# Altium PCB main.PcbDoc
Units mil, origin at the board's own origin, x right, y up, seen from the top; angles counter-clockwise.
Board outline 6000 x 4000 mil, 2 copper layers (Top Layer, Bottom Layer); 86 components, 158 nets, 530 pads, 0 vias.
Unrouted connection lines stored in the file: 279.
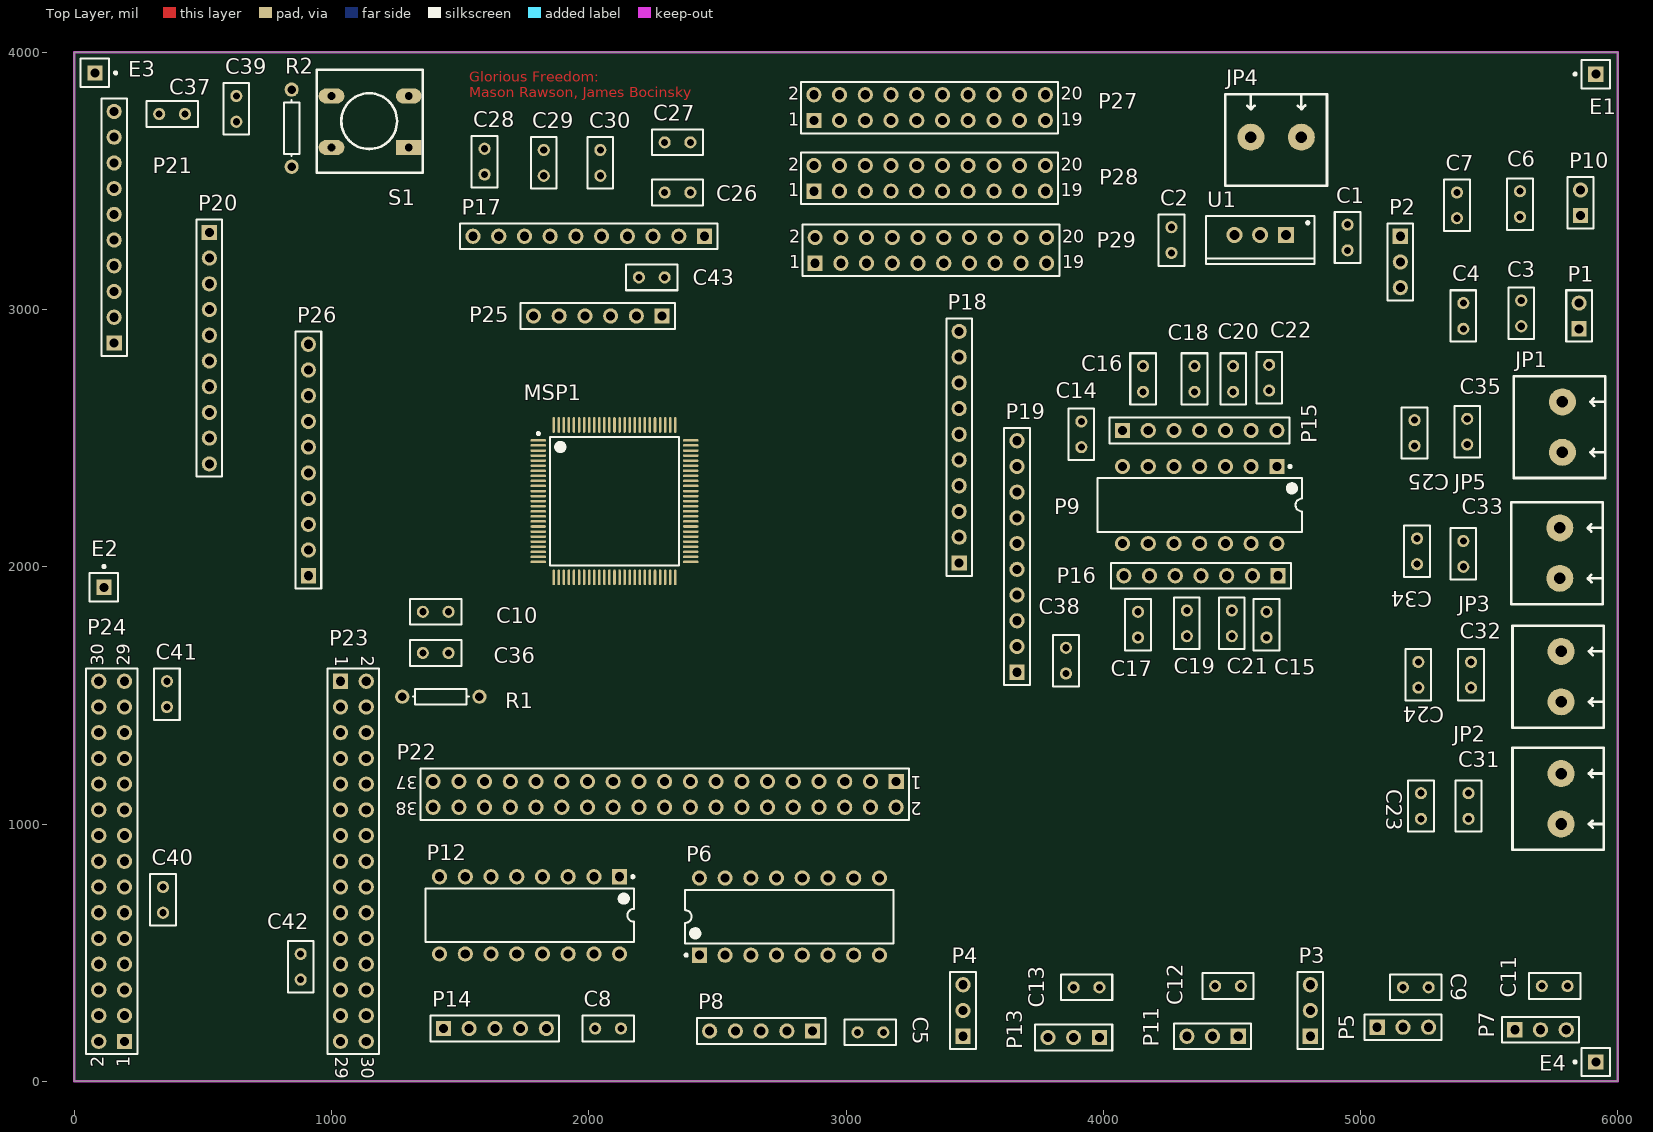
[diagram p0: Top Layer view]
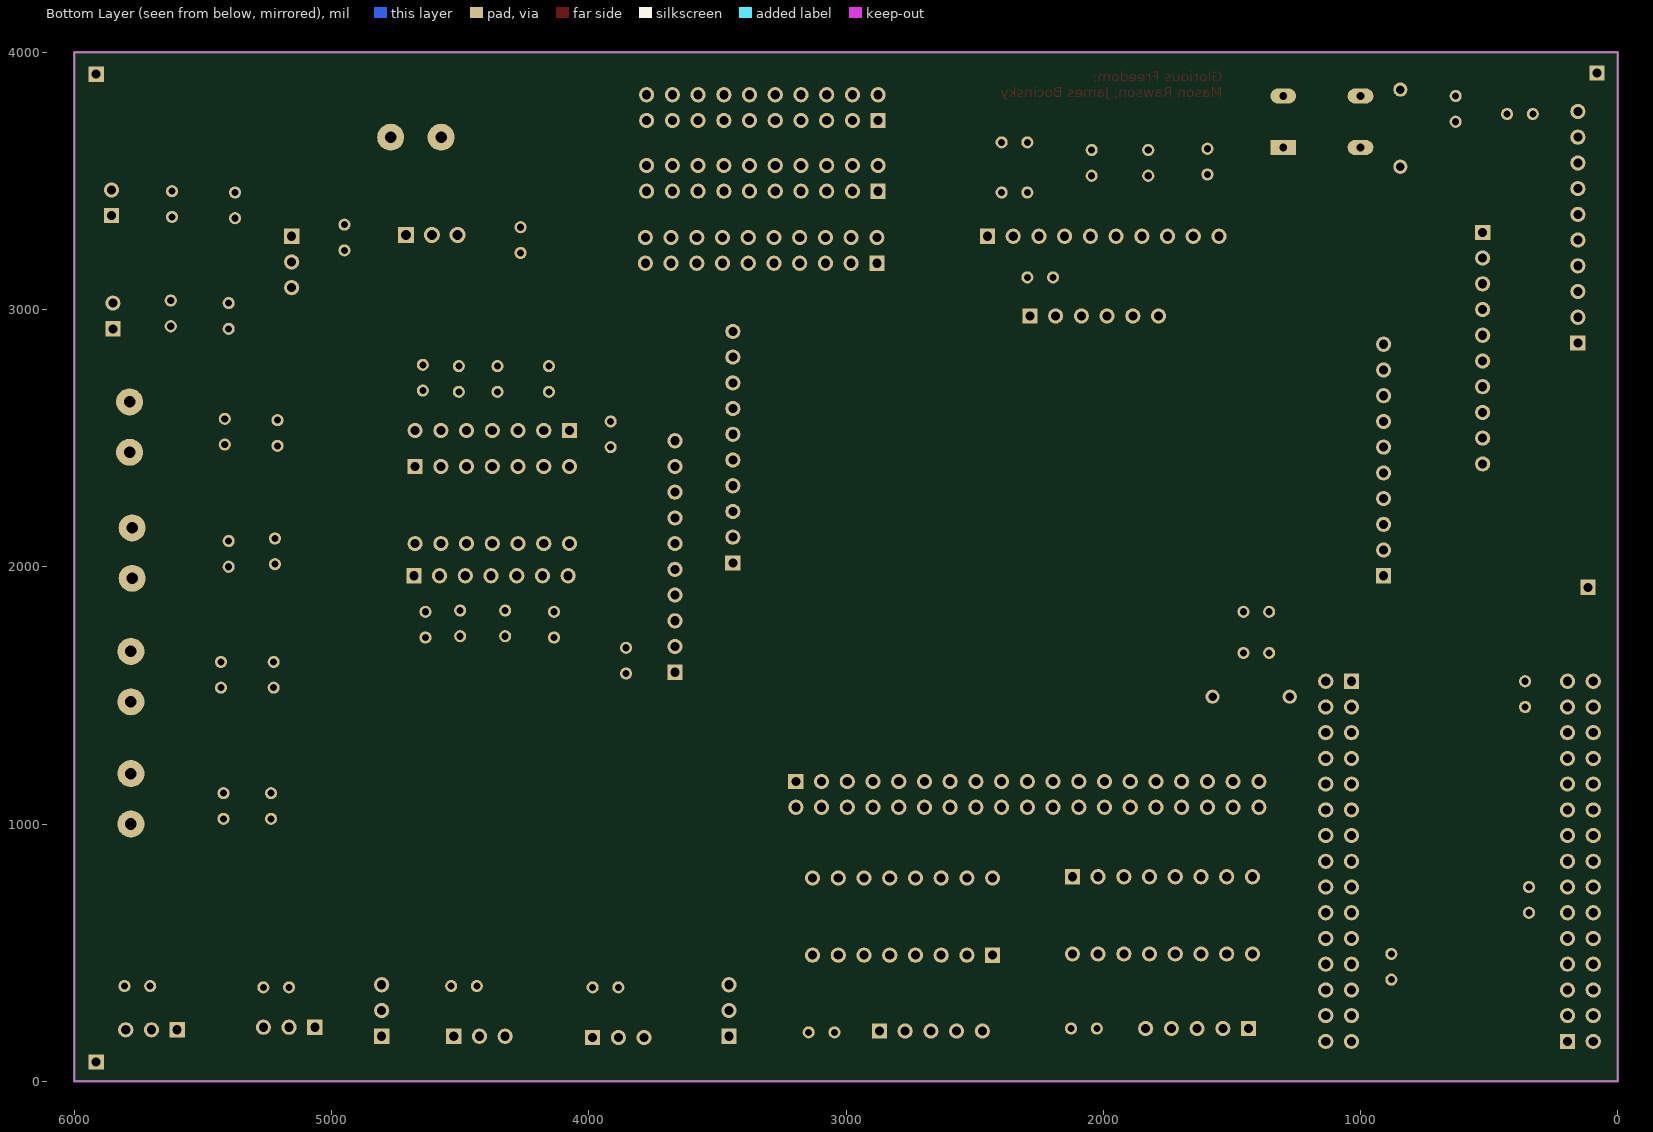
[diagram p1: Bottom Layer view, seen from below]

## Layer stack, top to bottom
Top Solder: solder mask 0.4, Solder Resist, Dk 3.5
Top Layer: signal copper 1.4
Dielectric 1: dielectric 12.6, FR-4, Dk 4.8
Bottom Layer: signal copper 1.4
Bottom Solder: solder mask 0.4, Solder Resist, Dk 3.5

## Board outline
0,0 6000,0 6000,4000 0,4000

## Design rules (kind name [scope] priority, off if disabled: settings)
Clearance CopperPour [inPolyGon] p1: gap=9
Clearance [All] p2: gap=9
PolygonConnect [All] p1: connectstyle=Relief reliefconductorwidth=10 reliefentries=4 polygonreliefangle="90 Angle" airgapwidth=10
RoutingVias [All] p1: holewidth=28 width=50 viastyle="Through Hole" minholewidth=28 minwidth=50 maxholewidth=28 maxwidth=50
SolderMaskExpansion [All] p1: expansion=4
Width "Schematic Width Constraint_6" [InNet('6V_S')] p1: maxlimit=50 minlimit=50 preferedwidth=50
Width "Schematic Width Constraint_5" [InNet('6V_1_F')] p2: maxlimit=50 minlimit=50 preferedwidth=50
Width "Schematic Width Constraint_3" [InNet('6V_1')] p3: maxlimit=50 minlimit=50 preferedwidth=50
Width "Schematic Width Constraint_2" [InNet('6V_0_F')] p4: maxlimit=50 minlimit=50 preferedwidth=50
Width "Schematic Width Constraint_1" [InNet('4V5_F')] p5: maxlimit=50 minlimit=50 preferedwidth=50
Width "Schematic Width Constraint" [InNet('4V5')] p6: maxlimit=50 minlimit=50 preferedwidth=50
Width "Schematic Width Constraint_7" [InNet('6V_L')] p7: maxlimit=50 minlimit=50 preferedwidth=50
Width "Schematic Width Constraint_4" [InNet('6V_0')] p8: maxlimit=50 minlimit=50 preferedwidth=50
Width [All] p9: maxlimit=10 minlimit=9 preferedwidth=10
30 further rules are at their usual default settings.

## Classes and differential pairs
component class power: C1 C2 C3 C4 C5 C6 C7 C8 C9 C11 C12 C13 C14 C15 C16 C17 C18 C19 C20 C21 C22 C23 C24 C25 C31 C32 C33 C34 C35 JP1 JP2 JP3 JP4 JP5 P1 P2 P3 P4 P5 P6 P7 P8 P9 P10 P11 P12 P13 P14 U1
component class logic: C10 C26 C27 C28 C29 C30 C36 C39 MSP1 R1 R2 S1
component class comm: C40 C41 C42 C43 P23 P24 P25
component class breakout: C37 C38 E1 E2 E3 E4 P15 P16 P17 P18 P19 P20 P21 P22 P26 P27 P28 P29

## Components (designator, comment, footprint, x,y, rotation, side; value= is the part's Value field where it differs from the comment)
C1 "Cap2" RAD-0.1 4950,3280 r90 top
C2 "Cap2" RAD-0.1 4265,3270 r270 top
C3 "Cap" RAD-0.1 5625,2985 r90 top
C4 "Cap" RAD-0.1 5400,2975 r270 top
C5 "Cap" RAD-0.1 3095,190 r180 top
C6 "Cap" RAD-0.1 5620,3410 r90 top
C7 "Cap" RAD-0.1 5375,3405 r270 top
C8 "Cap" RAD-0.1 2075,205 r0 top
C9 "Cap" RAD-0.1 5215,365 r180 top
C10 "Cap" RAD-0.1 1405,1825 r0 top
C11 "Cap" RAD-0.1 5755,370 r0 top
C12 "Cap" RAD-0.1 4485,370 r180 top
C13 "Cap" RAD-0.1 3935,365 r180 top
C14 "Cap" RAD-0.1 3915,2515 r270 top
C15 "Cap" RAD-0.1 4635,1775 r90 top
C16 "Cap" RAD-0.1 4155,2730 r270 top
C17 "Cap" RAD-0.1 4135,1775 r270 top
C18 "Cap" RAD-0.1 4355,2730 r270 top
C19 "Cap" RAD-0.1 4325,1780 r270 top
C20 "Cap" RAD-0.1 4505,2730 r270 top
C21 "Cap" RAD-0.1 4500,1780 r270 top
C22 "Cap" RAD-0.1 4645,2735 r270 top
C23 "Cap" RAD-0.1 5235,1070 r270 top
C24 "Cap" RAD-0.1 5225,1580 r270 top
C25 "Cap" RAD-0.1 5210,2520 r270 top
C26 "Cap" RAD-0.1 2345,3455 r0 top
C27 "Cap" RAD-0.1 2345,3650 r0 top
C28 "Cap" RAD-0.1 1595,3575 r90 top
C29 "Cap" RAD-0.1 1825,3570 r90 top
C30 "Cap" RAD-0.1 2045,3570 r90 top
C31 "Cap" RAD-0.1 5420,1070 r270 top
C32 "Cap" RAD-0.1 5430,1580 r270 top
C33 "Cap" RAD-0.1 5400,2050 r270 top
C34 "Cap" RAD-0.1 5220,2060 r270 top
C35 "Cap" RAD-0.1 5415,2525 r270 top
C36 "Cap" RAD-0.1 1405,1665 r0 top
C37 "Cap" RAD-0.1 380,3760 r180 top
C38 "Cap" RAD-0.1 3855,1635 r90 top
C39 "Cap" RAD-0.1 630,3780 r270 top
C40 "Cap" RAD-0.1 345,705 r270 top
C41 "Cap" RAD-0.1 360,1505 r90 top
C42 "Cap" RAD-0.1 880,445 r90 top
C43 "Cap" RAD-0.1 2245,3125 r180 top
E1 "mount" PIN1 5915,3915 r90 top
E2 "mount" PIN1 115,1920 r0 top
E3 "mount" PIN1 80,3920 r270 top
E4 "mount" PIN1 5915,75 r90 top
JP1 "gunPower" CON2screw 5785,2445 r90 top
JP2 "turretPower_0" CON2screw 5780,1000 r90 top
JP3 "turretPower_1" CON2screw 5780,1475 r90 top
JP4 "logicPower" CON2screw 4770,3670 r180 top
JP5 "stepperPower" CON2screw 5775,1955 r90 top
MSP1 "MSP432" PZ100_L 2100,2255 r0 top
P1 "gun_0" HDR1X2 5850,2925 r90 top
P2 "gunFet" HDR1X3 5155,3285 r270 top
P3 "turrFet_0" HDR1X3 4805,175 r90 top
P4 "turrFet_1" HDR1X3 3455,175 r90 top
P5 "pt_0" HDR1X3 5065,210 r0 top
P6 "ULN2003_0" DIP-16 2780,640 r90 top
P7 "pt_1" HDR1X3 5600,200 r0 top
P8 "stepper_0" HDR1X5 2870,195 r180 top
P9 "PWM_driver" DIP-14 4375,2240 r270 top
P10 "gun_1" HDR1X2 5855,3365 r90 top
P11 "pt_2" HDR1X3 4525,175 r180 top
P12 "ULN2003_1" DIP-16 1770,645 r270 top
P13 "pt_3" HDR1X3 3985,170 r180 top
P14 "stepper_1" HDR1X5 1435,205 r0 top
P15 "pwm_header_0" HDR1X7 4075,2530 r0 top
P16 "pwm_header_1" HDR1X7 4680,1965 r180 top
P17 "Programmer" HDR1X10 2450,3285 r180 top
P18 "J1" HDR1X10 3440,2015 r90 top
P19 "J3" HDR1X10 3665,1590 r90 top
P20 "J4" HDR1X10 525,3300 r270 top
P21 "J2" HDR1X10 155,2870 r90 top
P22 "Header 19X2" HDR2X19 3195,1165 r180 top
P23 "wifi_L" HDR2X15 1035,1555 r270 top
P24 "wifi_R" HDR2X15 195,155 r90 top
P25 "spi_bbgw" HDR1X6 2285,2975 r180 top
P26 "extraPorts" HDR1X10 910,1965 r90 top
P27 "proto_0" HDR2X10 2875,3735 r0 top
P28 "proto_1" HDR2X10 2875,3460 r0 top
P29 "proto_2" HDR2X10 2880,3180 r0 top
R1 "Res1" AXIAL-0.3 1425,1495 r180 top
R2 "Res1" AXIAL-0.3 845,3705 r270 top
S1 "SW-PB" "SW PB" 1300,3630 r180 top
U1 "LM2940CT-3.3" T03B 4610,3290 r180 top

## Footprints (in the part's own frame and the unit in brackets; to place one, negate y for a bottom-side part, rotate by r counter-clockwise, add the part's x,y. Pads: shape width x height; smd on the part's side, far side on the other; paste and mask are expansions set on the pad)
AXIAL-0.3 [mm] "Axial Device, Thru-Hole; 2 Leads; 0.3 in Pin Spacing"
  round 1.4 hole 0.85: 1(-3.81,0) 2(3.81,0)
  silkscreen extent -2.77,-0.76 2.77,0.76
CON2screw [mil]
  round 105 hole 45: 1(0,0) 2(196,0)
  silkscreen extent -100,-166 296,189
DIP-14 [mm] "DIP; 14 Leads; Row Spacing 7.62 mm; Pitch 2.54 mm"
  rect 1.5x1.5 hole 0.9: 1(-3.81,7.62)
  round 1.5 hole 0.9: 2(-3.81,5.08) 3(-3.81,2.54) 4(-3.81,0) 5(-3.81,-2.54) 6(-3.81,-5.08) 7(-3.81,-7.62) 8(3.81,-7.62) 9(3.81,-5.08) 10(3.81,-2.54) 11(3.81,0) 12(3.81,2.54) 13(3.81,5.08) 14(3.81,7.62)
  silkscreen extent -3.93,-10.1 2.65,10.1, body extent -3.6,-10.1 3.6,10.1, height 5.08
DIP-16 [mm] "DIP; 16 Leads; Row Spacing 7.62 mm; Pitch 2.54 mm"
  rect 1.5x1.5 hole 0.9: 1(-3.81,8.89)
  round 1.5 hole 0.9: 2(-3.81,6.35) 3(-3.81,3.81) 4(-3.81,1.27) 5(-3.81,-1.27) 6(-3.81,-3.81) 7(-3.81,-6.35) 8(-3.81,-8.89) 9(3.81,-8.89) 10(3.81,-6.35) 11(3.81,-3.81) 12(3.81,-1.27) 13(3.81,1.27) 14(3.81,3.81) 15(3.81,6.35) 16(3.81,8.89)
  silkscreen extent -3.93,-10.3 2.65,10.31, body extent -3.6,-10.28 3.6,10.28, height 5.08
HDR1X2 [mm] "Connector; Header; 2 Position"
  rect 1.5x1.5 hole 0.9: 1(0,0)
  round 1.5 hole 0.9: 2(2.54,0)
  silkscreen extent -1.27,-1.27 3.81,1.27
HDR1X3 [mm] "Connector; Header; 3 Position"
  rect 1.5x1.5 hole 0.9: 1(0,0)
  round 1.5 hole 0.9: 2(2.54,0) 3(5.08,0)
  silkscreen extent -1.27,-1.27 6.35,1.27
HDR1X5 [mm] "Connector; Header; 5 Position"
  rect 1.5x1.5 hole 0.9: 1(0,0)
  round 1.5 hole 0.9: 2(2.54,0) 3(5.08,0) 4(7.62,0) 5(10.16,0)
  silkscreen extent -1.27,-1.27 11.43,1.27
HDR1X6 [mm] "Connector; Header; 6 Position"
  rect 1.5x1.5 hole 0.9: 1(0,0)
  round 1.5 hole 0.9: 2(2.54,0) 3(5.08,0) 4(7.62,0) 5(10.16,0) 6(12.7,0)
  silkscreen extent -1.27,-1.27 13.97,1.27
HDR1X7 [mm] "Connector; Header; 7 Position"
  rect 1.5x1.5 hole 0.9: 1(0,0)
  round 1.5 hole 0.9: 2(2.54,0) 3(5.08,0) 4(7.62,0) 5(10.16,0) 6(12.7,0) 7(15.24,0)
  silkscreen extent -1.27,-1.27 16.51,1.27
HDR1X10 [mm] "Connector; Header; 10 Position"
  rect 1.5x1.5 hole 0.9: 1(0,0)
  round 1.5 hole 0.9: 2(2.54,0) 3(5.08,0) 4(7.62,0) 5(10.16,0) 6(12.7,0) 7(15.24,0) 8(17.78,0) 9(20.32,0) 10(22.86,0)
  silkscreen extent -1.27,-1.27 24.13,1.27
HDR2X10 [mm] "Connector; Header; 10x2 Position"
  rect 1.5x1.5 hole 0.9: 1(0,0)
  round 1.5 hole 0.9: 2(0,2.54) 3(2.54,0) 4(2.54,2.54) 5(5.08,0) 6(5.08,2.54) 7(7.62,0) 8(7.62,2.54) 9(10.16,0) 10(10.16,2.54) 11(12.7,0) 12(12.7,2.54) 13(15.24,0) 14(15.24,2.54) 15(17.78,0) 16(17.78,2.54) 17(20.32,0) 18(20.32,2.54) 19(22.86,0) 20(22.86,2.54)
  silkscreen extent -1.27,-1.27 24.13,3.81
HDR2X15 [mm] "Connector; Header; 15x2 Position"
  rect 1.5x1.5 hole 0.9: 1(0,0)
  round 1.5 hole 0.9: 2(0,2.54) 3(2.54,0) 4(2.54,2.54) 5(5.08,0) 6(5.08,2.54) 7(7.62,0) 8(7.62,2.54) 9(10.16,0) 10(10.16,2.54) 11(12.7,0) 12(12.7,2.54) 13(15.24,0) 14(15.24,2.54) 15(17.78,0) 16(17.78,2.54) 17(20.32,0) 18(20.32,2.54) 19(22.86,0) 20(22.86,2.54) 21(25.4,0) 22(25.4,2.54) 23(27.94,0) 24(27.94,2.54) 25(30.48,0) 26(30.48,2.54) 27(33.02,0) 28(33.02,2.54) 29(35.56,0) 30(35.56,2.54)
  silkscreen extent -1.27,-1.27 36.83,3.81
HDR2X19 [mm] "Connector; Header; 19x2 Position"
  rect 1.5x1.5 hole 0.9: 1(0,0)
  round 1.5 hole 0.9: 2(0,2.54) 3(2.54,0) 4(2.54,2.54) 5(5.08,0) 6(5.08,2.54) 7(7.62,0) 8(7.62,2.54) 9(10.16,0) 10(10.16,2.54) 11(12.7,0) 12(12.7,2.54) 13(15.24,0) 14(15.24,2.54) 15(17.78,0) 16(17.78,2.54) 17(20.32,0) 18(20.32,2.54) 19(22.86,0) 20(22.86,2.54) 21(25.4,0) 22(25.4,2.54) 23(27.94,0) 24(27.94,2.54) 25(30.48,0) 26(30.48,2.54) 27(33.02,0) 28(33.02,2.54) 29(35.56,0) 30(35.56,2.54) 31(38.1,0) 32(38.1,2.54) 33(40.64,0) 34(40.64,2.54) 35(43.18,0) 36(43.18,2.54) 37(45.72,0) 38(45.72,2.54)
  silkscreen extent -1.27,-1.27 46.99,3.81
PIN1 [mm] "Generic Antenna; 1 Lead"
  rect 1.5x1.5 hole 0.9: 1(0,0)
  silkscreen extent -1.4,-1.4 1.4,2.17
PZ100_L [mm] "100-Pin Thin Quad Flat Pack 0.5 mm Pitch, IPC High Density"
  oval 1.55x0.25 smd: 1(-7.525,6) 2(-7.525,5.5) 3(-7.525,5) 4(-7.525,4.5) 5(-7.525,4) 6(-7.525,3.5) 7(-7.525,3) 8(-7.525,2.5) 9(-7.525,2) 10(-7.525,1.5) 11(-7.525,1) 12(-7.525,0.5) 13(-7.525,0) 14(-7.525,-0.5) 15(-7.525,-1) 16(-7.525,-1.5) 17(-7.525,-2) 18(-7.525,-2.5) 19(-7.525,-3) 20(-7.525,-3.5) 21(-7.525,-4) 22(-7.525,-4.5) 23(-7.525,-5) 24(-7.525,-5.5) 25(-7.525,-6) 51(7.525,-6) 52(7.525,-5.5) 53(7.525,-5) 54(7.525,-4.5) 55(7.525,-4) 56(7.525,-3.5) 57(7.525,-3) 58(7.525,-2.5) 59(7.525,-2) 60(7.525,-1.5) 61(7.525,-1) 62(7.525,-0.5) 63(7.525,0) 64(7.525,0.5) 65(7.525,1) 66(7.525,1.5) 67(7.525,2) 68(7.525,2.5) 69(7.525,3) 70(7.525,3.5) 71(7.525,4) 72(7.525,4.5) 73(7.525,5) 74(7.525,5.5) 75(7.525,6)
  oval 0.25x1.55 smd: 26(-6,-7.525) 27(-5.5,-7.525) 28(-5,-7.525) 29(-4.5,-7.525) 30(-4,-7.525) 31(-3.5,-7.525) 32(-3,-7.525) 33(-2.5,-7.525) 34(-2,-7.525) 35(-1.5,-7.525) 36(-1,-7.525) 37(-0.5,-7.525) 38(0,-7.525) 39(0.5,-7.525) 40(1,-7.525) 41(1.5,-7.525) 42(2,-7.525) 43(2.5,-7.525) 44(3,-7.525) 45(3.5,-7.525) 46(4,-7.525) 47(4.5,-7.525) 48(5,-7.525) 49(5.5,-7.525) 50(6,-7.525) 76(6,7.525) 77(5.5,7.525) 78(5,7.525) 79(4.5,7.525) 80(4,7.525) 81(3.5,7.525) 82(3,7.525) 83(2.5,7.525) 84(2,7.525) 85(1.5,7.525) 86(1,7.525) 87(0.5,7.525) 88(0,7.525) 89(-0.5,7.525) 90(-1,7.525) 91(-1.5,7.525) 92(-2,7.525) 93(-2.5,7.525) 94(-3,7.525) 95(-3.5,7.525) 96(-4,7.525) 97(-4.5,7.525) 98(-5,7.525) 99(-5.5,7.525) 100(-6,7.525)
  silkscreen extent -7.65,-6.35 6.35,6.8, body extent -7,-7 7,7, height 1.6
RAD-0.1 [mm] "Radial Cap, Thru-Hole; 2 Leads; 0.1 in Pin Spacing"
  round 1.2 hole 0.7: 1(-1.27,0) 2(1.27,0)
  silkscreen extent -2.54,-1.27 2.54,1.27
"SW PB" [mil]
  rect 100x60 hole 30: 1(0,0)
  oval 100x60 hole 30: 2(0,-200) 3(300,-200) 4(300,0)
  silkscreen extent -55,-302 358,98
T03B [mm]
  rect 1.6x1.6 hole 1: 1(-2.54,0)
  round 1.6 hole 1: 2(0,0) 3(2.54,0)
  silkscreen extent -5.35,-1.85 5.35,2.85, body extent -5.4,-1.9 5.4,2.9, height 19.4

## Part data
C1 C2 C3 C4 C5 C6 C7 C8 C9 C10 C11 C12 C13 C14 C15 C16 C17 C18 C19 C20 C21 C22 C23 C24 C25 C26 C27 C28 C29 C30 C31 C32 C33 C34 C35 C36 C37 C38 C39 C40 C41 C42 C43: "Capacitor"
E1 E2 E3 E4: library part Antenna, "Generic Antenna"
JP1 JP2 JP3 JP4 JP5: library part Power
P1 P10: library part "Header 2", "Header, 2-Pin"
P2 P3 P4 P5 P7 P11 P13: library part "Header 3", "Header, 3-Pin"
P6 P12: library part "Header 8X2", "Header, 8-Pin, Dual row"
P8 P14: library part "Header 5", "Header, 5-Pin"
P9: library part "Header 7X2A", "Header, 7-Pin, Dual row"
P15 P16: library part "Header 7", "Header, 7-Pin"
P17 P18 P19 P20 P21 P26: library part "Header 10", "Header, 10-Pin"
P22: "Header, 19-Pin, Dual row"
P23 P24: library part "Header 15X2", "Header, 15-Pin, Dual row"
P25: library part "Header 6", "Header, 6-Pin"
P27 P28 P29: library part "Header 10X2", "Header, 10-Pin, Dual row"
R1 R2: "Resistor"
S1: library part SW-PB_2, "DIGIKEY SW400-ND"
U1: library part LM2940CT-5.0, "1A Low Dropout Regulator, 3-pin TO-220"

## Nets (pads, with @x,y where several pads share a name; then routed paths per layer and width w, separated by ;. In a path a pad name is that pad's centre, name@x,y a point inside that pad or via, vN(x,y) a via of type N, cw(c..) or ccw(c..) an arc to the next point about the centre after c; other vN are vias at no path point)
4V5: C3.2 C4.1 C6.2 C7.1 C25.2 C35.2 JP1.1 P1.2 P10.2
4V5_F: P1.1 P2.2 P10.1
6V_0: C9.2 C11.2 C23.2 C31.2 JP2.1 P5.2 P7.2
6V_0_F: P3.2 P5.1 P7.1
6V_1: C12.2 C13.2 C24.2 C32.2 JP3.1 P11.2 P13.2
6V_1_F: P4.2 P11.1 P13.1
6V_L: C1.1 C14.2 JP4.1 P9.8 P16.7 U1.1
6V_S: C5.2 C8.2 C33.2 C34.2 JP5.1 P6.16 P8.1 P12.16 P14.1
BBGW_CS: P25.6
BBGW_MISO: MSP1.11 P21.4 P25.4
BBGW_MOSI: MSP1.10 P21.5 P25.5
BBGW_SCLK: MSP1.9 P18.7 P25.3
CLK: P23.17 P23.18
GPIO_GUN: MSP1.49 P2.1 P22.2
GPIO_TURR_0: MSP1.50 P3.1 P22.1
GPIO_TURR_1: MSP1.51 P4.1 P22.3
MSP_PWM_0: C17.1 MSP1.20 P9.2 P9.3 P15.5 P15.6 P20.8
MSP_PWM_1: MSP1.21 P21.9
MSP_PWM_2: C22.2 MSP1.22 P9.13 P9.14 P16.1 P16.2 P20.9
MSP_PWM_3: C18.2 MSP1.23 P9.10 P9.11 P16.4 P16.5 P20.10
NetMSP1_44: MSP1.44 R1.2
P1.0_LED1: MSP1.4 P26.10
P1.1_BUTTON1: MSP1.5 P26.9
P1.2_BCLUART_RXD: MSP1.6 P26.8
P1.3_BCLUART_TXD: MSP1.7 P26.7
P1.4_BUTTON2: MSP1.8 P26.6
P2.0_RGBLED_RED: MSP1.16 P26.5
P2.1_RGBLED_GREEN: MSP1.17 P26.4
P2.2_RGBLED_BLUE: MSP1.18 P26.3
P2.3_IO_J4.34: MSP1.19 P20.4
P3.0_IO_J2.18: MSP1.32 P21.8
P3.1_BCLUART_RTS: MSP1.33
P3.2_URXD_J1.3: MSP1.34 P18.3 P24.25 P24.26
P3.3_UTXD_J1.4: MSP1.35 P18.4 P24.23 P24.24
P3.4_BCLUART_CTS: MSP1.36
P3.5_IO_J4.32: MSP1.37 P20.2
P3.6_IO_J2.11: MSP1.38 P21.1
P3.7_IO_J4.31: MSP1.39 P20.1
P4.0_A13_J3.24: MSP1.56 P6.1 P19.4
P4.1_IO_J1.5: MSP1.57 P18.5
P4.2_A11_J3.25: MSP1.58 P6.3 P19.5
P4.3_A10_J1.6: MSP1.59 P18.6
P4.4_A9_J3.26: MSP1.60 P6.5 P19.6
P4.5_A8_J3.27: MSP1.61 P6.7 P19.7
P4.6_IO_J1.8: MSP1.62 P18.8
P4.7_A6_J3.28: MSP1.63 P19.8
P5.0_IO_J2.13: MSP1.64 P21.3
P5.1_IO_J4.33: MSP1.65 P20.3
P5.2_IO_J2.12: MSP1.66 P21.2
P5.3: MSP1.67 P22.9
P5.4_IO_J3.29: MSP1.68 P19.9
P5.5_IO_J3.30: MSP1.69 P19.10
P5.6_PWM_J4.37: MSP1.70 P20.7
P5.7_IO_J2.17: MSP1.71 P21.7
P6.0_A15_J1.2: MSP1.54 P12.1 P18.2
P6.1_A14_J3.23: MSP1.55 P12.3 P19.3
P6.2: MSP1.76 P22.12
P6.3: MSP1.77 P22.13
P6.4_I2CSDA_J1.10: MSP1.78 P12.5 P18.10
P6.5_I2CSCL_J1.9: MSP1.79 P12.7 P18.9
P6.6_CAPTURE_J4.36: MSP1.80 P20.6
P6.7_CAPTURE_J4.35: MSP1.81 P20.5
P7.0: MSP1.88 P22.17
P7.1: MSP1.89 P22.16
P7.2: MSP1.90 P22.15
P7.3: MSP1.91 P22.14
P7.4: MSP1.26 P22.24
P7.5: MSP1.27 P22.23
P7.6: MSP1.28 P22.26
P7.7: MSP1.29 P22.25
P8.0: MSP1.30 P22.22
P8.1: MSP1.31
P8.2: MSP1.46 P22.8
P8.3: MSP1.47 P22.7
P8.4: MSP1.48 P22.6
P9.0: MSP1.52 P22.4
P9.1: MSP1.53 P22.5
P9.2: MSP1.74 P22.10
P9.3: MSP1.75 P22.11
P9.4: MSP1.96 P22.18
P9.5: MSP1.97 P22.19
P9.6: MSP1.98 P22.20
P9.7: MSP1.99 P22.21
P10.0: MSP1.100 P22.28
P10.1: MSP1.1 P22.27
P10.2: MSP1.2 P22.30
P10.3: MSP1.3 P22.29
P10.4: MSP1.24 P22.32
P10.5: MSP1.25 P22.31
PROTO_0: P27.1 P27.2
PROTO_1: P27.3 P27.4
PROTO_2: P27.5 P27.6
PROTO_3: P27.7 P27.8
PROTO_4: P27.9 P27.10
PROTO_5: P27.11 P27.12
PROTO_6: P27.13 P27.14
PROTO_7: P27.15 P27.16
PROTO_8: P27.17 P27.18
PROTO_9: P27.19 P27.20
PROTO_10: P28.1 P28.2
PROTO_11: P28.3 P28.4
PROTO_12: P28.5 P28.6
PROTO_13: P28.7 P28.8
PROTO_14: P28.9 P28.10
PROTO_15: P28.11 P28.12
PROTO_16: P28.13 P28.14
PROTO_17: P28.15 P28.16
PROTO_18: P28.17 P28.18
PROTO_19: P28.19 P28.20
PROTO_20: P29.1 P29.2
PROTO_21: P29.3 P29.4
PROTO_22: P29.5 P29.6
PROTO_23: P29.7 P29.8
PROTO_24: P29.9 P29.10
PROTO_25: P29.11 P29.12
PROTO_26: P29.13 P29.14
PROTO_27: P29.15 P29.16
PROTO_28: P29.17 P29.18
PROTO_29: P29.19 P29.20
PWM_0: C15.1 P5.3 P9.1 P15.7
PWM_1: C19.1 P7.3 P9.4 P15.4
PWM_2: C20.2 P9.12 P11.3 P16.3
PWM_3: C16.2 P9.9 P13.3 P16.6
PWM_H_5: C21.1 P9.5 P9.6 P15.2 P15.3
PWM_H_7: C1.2 C2.2 C3.1 C4.2 C5.1 C6.1 C7.2 C8.1 C9.1 C10.1 C11.1 C12.1 C13.1 C14.1 C15.2 C16.1 C17.2 C18.1 C19.2 C20.1 C21.2 C22.1 C23.1 C24.1 C25.1 C26.1 C27.1 C28.1 C29.1 C30.1 C31.1 C32.1 C33.1 C34.1 C35.1 C36.1 C37.2 C38.2 C39.1 C40.1 C41.1 C42.1 C43.1 E1.1 E2.1 E3.1 E4.1 JP1.2 JP2.2 JP3.2 JP4.2 JP5.2 MSP1.15 MSP1.40 MSP1.43 MSP1.72 MSP1.82 MSP1.84 P2.3 P3.3 P4.3 P6.9 P6.11 P6.13 P6.15 P9.7 P12.9 P12.11 P12.13 P12.15 P15.1 P17.3 P17.5 P17.7 P17.9 P19.2 P21.10 P22.37 P22.38 P23.19 P23.20 P23.27 P23.28 P24.13 P24.14 P24.27 P24.28 P25.1 P26.1 P26.2 R1.1 S1.2 U1.2
R\S\T\: C39.2 MSP1.83 P17.10 P21.6 R2.1 S1.1
S_0_BLUE: P6.2 P8.5
S_0_ORG: P6.8 P8.2
S_0_PINK: P6.4 P8.4
S_0_YEL: P6.6 P8.3
S_1_BLUE: P12.2 P14.5
S_1_ORG: P12.8 P14.2
S_1_PINK: P12.4 P14.4
S_1_YEL: P12.6 P14.3
TCK_SWCLK: MSP1.95 P17.8
TDI: MSP1.92 P17.4
TDO_SWO: MSP1.93 P17.6
TMS_SWDIO: MSP1.94 P17.2
VCC_3.3V: C2.1 C26.2 C27.2 C28.2 C29.2 C30.2 C37.1 C38.1 C40.2 C41.2 C42.2 C43.2 MSP1.13 MSP1.45 MSP1.73 MSP1.87 P17.1 P18.1 P19.1 P22.33 P22.34 P22.35 P22.36 P23.21 P23.22 P24.11 P24.12 P24.29 P24.30 P25.2 R2.2 U1.3
VCORE: C10.2 C36.2 MSP1.12
WIFI_A0: P23.1 P23.2
WIFI_CMD: P23.13 P23.14
WIFI_D0: P24.1 P24.2
WIFI_D1: P24.3 P24.4
WIFI_D2: P24.5 P24.6
WIFI_D3: P24.7 P24.8
WIFI_D4: P24.9 P24.10
WIFI_D5: P24.15 P24.16
WIFI_D6: P24.17 P24.18
WIFI_D7: P24.19 P24.20
WIFI_D8: P24.21 P24.22
WIFI_EN: P23.23 P23.24
WIFI_RST: P23.25 P23.26
WIFI_SD0: P23.15 P23.16
WIFI_SD1: P23.11 P23.12
WIFI_SD2: P23.9 P23.10
WIFI_SD3: P23.7 P23.8
WIFI_VIN: P23.29 P23.30
pads on no net: MSP1.14 MSP1.41 MSP1.42 MSP1.85 MSP1.86 P6.10 P6.12 P6.14 P12.10 P12.12 P12.14 P23.3 P23.4 P23.5 P23.6 S1.3 S1.4

## Polygon pours and split planes (outlines as drawn)
PWM_H_7 on Top Layer "topGnd" (solid, shelved, pour order 6): 0,0 0,4000 6000,4000 6000,0 0,0

## Keep-outs
Keep-Out Layer:
  the board outline again, w10

## Other copper
Top Layer:
  text "Glorious Freedom:  / Mason Rawson, James Bocinsky" at 1535,3825 h40

## Text inside footprints (layer, text, board x,y; h text height)
P22: Top Overlay "2" at 3295,1085 h50 r180; Top Overlay "1" at 3295,1185 h50 r180; Top Overlay "37" at 1335,1185 h50 r180; Top Overlay "38" at 1335,1085 h50 r180
P23: Top Overlay "1" at 1015,1655 h50 r270; Top Overlay "2" at 1115,1655 h50 r270; Top Overlay "29" at 1015,95 h50 r270; Top Overlay "30" at 1115,95 h50 r270
P24: Top Overlay "1" at 215,55 h50 r90; Top Overlay "2" at 115,55 h50 r90; Top Overlay "29" at 215,1615 h50 r90; Top Overlay "30" at 115,1615 h50 r90
P27: Top Overlay "20" at 3835,3815 h50; Top Overlay "19" at 3835,3715 h50; Top Overlay "1" at 2775,3715 h50; Top Overlay "2" at 2775,3815 h50
P28: Top Overlay "20" at 3835,3540 h50; Top Overlay "19" at 3835,3440 h50; Top Overlay "1" at 2775,3440 h50; Top Overlay "2" at 2775,3540 h50
P29: Top Overlay "20" at 3840,3260 h50; Top Overlay "19" at 3840,3160 h50; Top Overlay "1" at 2780,3160 h50; Top Overlay "2" at 2780,3260 h50